# EAGLE board Shield (EAGLE 9.6.0)
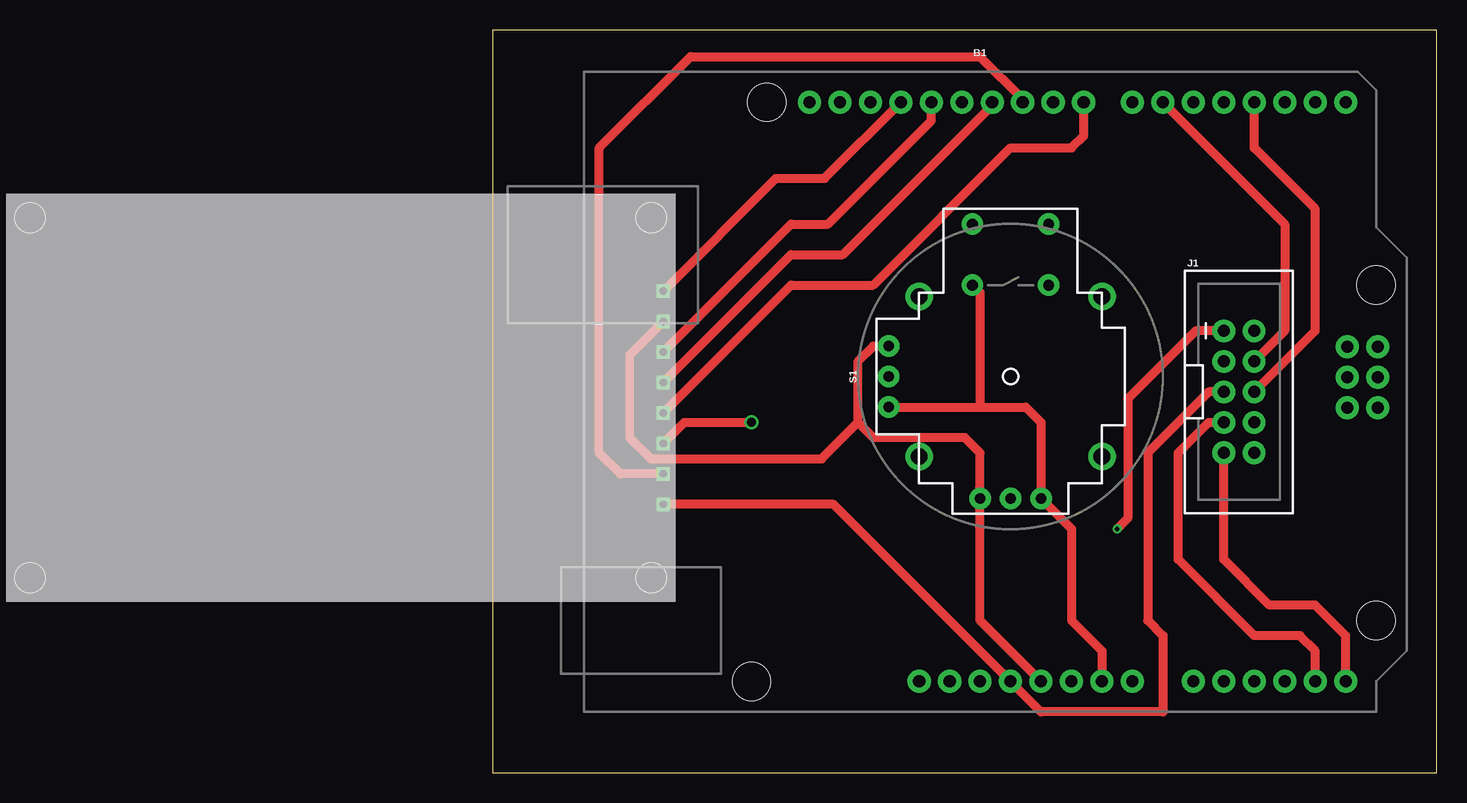
[diagram p0: board, top side]
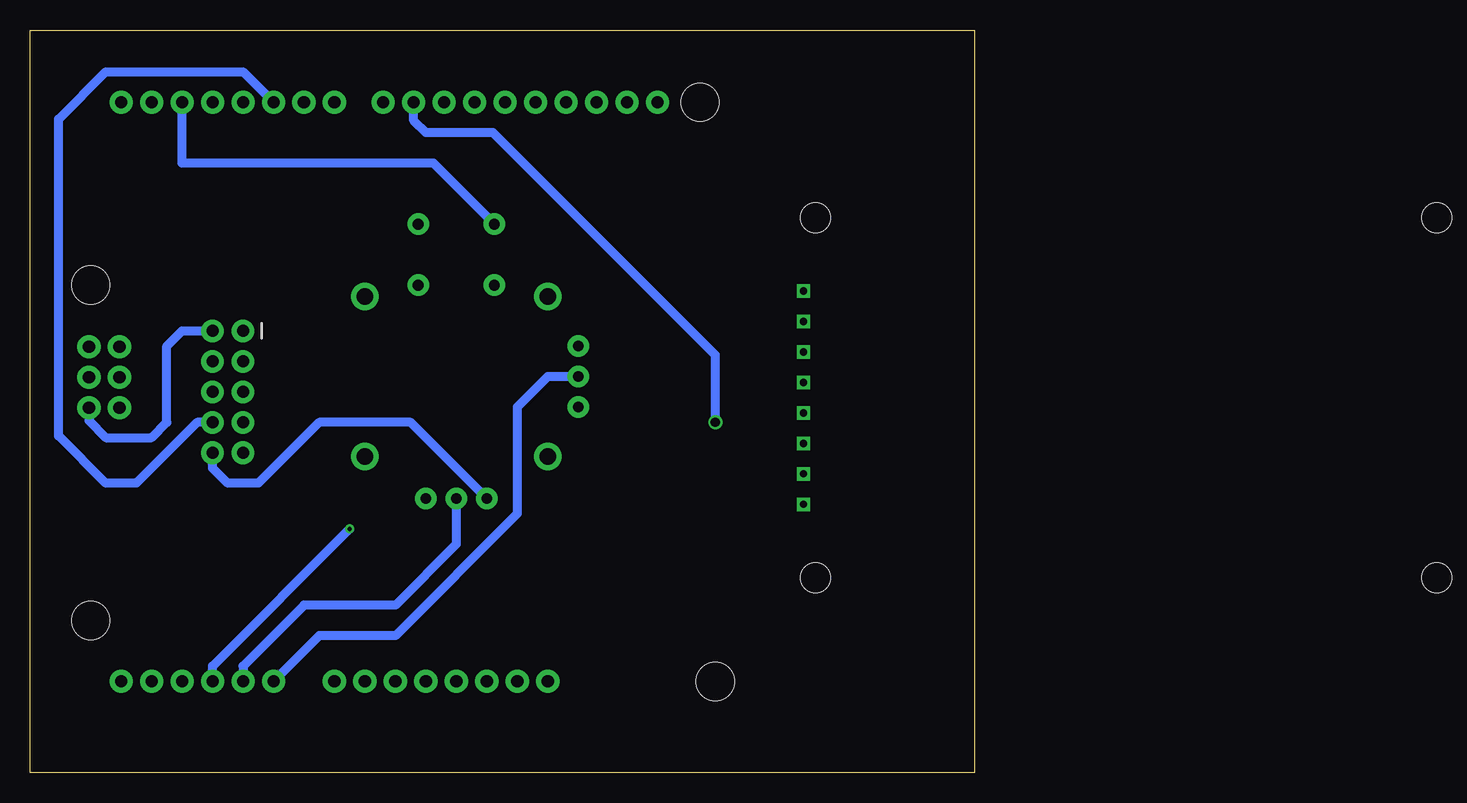
[diagram p1: board, bottom side, seen from below]

Size 78.72 x 61.9 mm. Coordinates in mm from the lower left corner, seen from the top.
Outline: 0,0 78.72,0 78.72,61.9 0,61.9 0,0
Copper layers (1*16): Top 0.035mm / dielectric 1.5mm / Bottom 0.035mm
Design rules "default": minimum track width 6mil, minimum drill 0.35mm, track to track 6mil, track to pad 6mil, pad to pad 6mil, via to via 6mil, smd to smd 6mil, copper to edge 40mil, drill to drill 6mil, minimum pad ring 10mil, minimum via ring 8mil, stop-mask expansion 4mil, vias tented up to drill 0mil, thermal gap 10mil

## Footprints (pad centres in the part's own frame; a part is rotated, then mirrored left to right if it is on the bottom)
TFT_DISP = drill 0.6 square: 1 8.11,-1; 2 10.65,-1; 3 13.19,-1; 4 15.73,-1; 5 18.27,-1; 6 20.81,-1; 7 23.35,-1; 8 25.89,-1 | hole 2.5: 2,-2; 32,-2; 2,-53.8; 32,-53.8
ARDUINO_R3 = drill 1.016 pad 1.93: 3.3V 2.54,-24.13; 5V 5.08,-24.13; A0 17.78,-24.13; A1 20.32,-24.13; A2 22.86,-24.13; A3 25.4,-24.13; A4 27.94,-24.13; A5 30.48,-24.13; AREF -9.144,24.13; D0 30.48,24.13; D1 27.94,24.13; D2 25.4,24.13; D3 22.86,24.13; D4 20.32,24.13; D5 17.78,24.13; D6 15.24,24.13; D7 12.7,24.13; D8 8.636,24.13; D9 6.096,24.13; D10 3.556,24.13; D11 1.016,24.13; D12 -1.524,24.13; D13 -4.064,24.13; GND@1 7.62,-24.13; GND@2 10.16,-24.13; GND@3 -6.604,24.13; GND@4 33.16,-1.32; IOREF -2.54,-24.13; MISO 30.62,3.76; MOSI 33.16,1.22; NC -5.08,-24.13; RESET@1 0,-24.13; RESET@2 30.62,-1.32; SCK 30.62,1.22; SCL -14.224,24.13; SDA -11.684,24.13; VCC 33.16,3.76; VIN 12.7,-24.13 | hole 3.175: -17.78,24.13; 33.02,8.89; 33.02,-19.05; -19.05,-24.13
2X5-SHROUDED = drill 1.016 pad 1.88: 1 -1.27,5.08; 2 1.27,5.08; 3 -1.27,2.54; 4 1.27,2.54; 5 -1.27,0; 6 1.27,0; 7 -1.27,-2.54; 8 1.27,-2.54; 9 -1.27,-5.08; 10 1.27,-5.08
JOYSTICK = drill 0.9 pad 1.778: B1A -3.175,12.7; B1B 3.175,12.7; B2A -3.175,7.62; B2B 3.175,7.62 | drill 0.889 pad 1.778: H1 -2.54,-10.16; H2 0,-10.16; H3 2.54,-10.16; V1 -10.16,2.54; V2 -10.16,0; V3 -10.16,-2.54 | drill 1.397 pad 2.286: MOUNT1 -7.62,6.668; MOUNT2 -7.62,-6.668; MOUNT3 7.62,-6.668; MOUNT4 7.62,6.668

## Placement (x,y rotation side)
1.77_TFT  TFT_DISPL_1.77"  [TFT_DISP]  15.24,48.26 270 top
B1  ARDUINO_UNO_R3  [ARDUINO_R3]  40.64,31.75 0 top
J1  [2X5-SHROUDED]  62.23,31.75 0 top
S1  JOYSTICK_THUMB  [JOYSTICK]  43.18,33.02 0 top

## Library data of the parts
1.77_TFT = ChopstixComponents
B1 = SparkFun-Boards
J1 = SparkFun-Connectors; PROD_ID: CONN-08671; SF_ID: PRT-08506
S1 = SparkFun-Switches; PROD_ID: COMP-09744; SF_SKU: COM-09032

## Nets
2: B1.D2 S1.B1A
3.3V: 1.77_TFT.8 B1.3.3V J1.5
5V: 1.77_TFT.2 B1.5V J1.10 S1.H1 S1.V1
8: 1.77_TFT.5 B1.D8
9: 1.77_TFT.6 B1.D9
10: 1.77_TFT.7 B1.D10
11: 1.77_TFT.4 B1.D11
13: 1.77_TFT.3 B1.D13
A0: B1.A0 S1.V2
A1: B1.A1 S1.H2
A2: B1.A2 J1.1
A4: B1.A4 J1.7
A5: B1.A5 J1.9
D3: B1.D3 J1.6
D5: B1.D5 J1.8
D6: B1.D6 J1.4
GND0: B1.GND@4 J1.2
GND1: 1.77_TFT.1 B1.GND@3
GND2: B1.GND@2 S1.B2A S1.H3 S1.V3

## Tracks (layer width: path | path; a pad name or v marks a point on that pad's centre or on a via)
2
  Bottom 0.762: S1.B1A 45.08,50.8 66.04,50.8 B1.D2
3.3V
  Top 0.762: 1.77_TFT.8 28.43,22.37 B1.3.3V 45.72,5.08 55.88,5.08 55.88,11.43 54.61,12.7 54.61,26.67 59.69,31.75 J1.5
5V
  Top 0.762: 30.48,29.21 31.75,27.94 39.37,27.94 40.64,26.67 S1.H1 40.64,12.7 B1.5V | 30.48,29.21 30.48,34.29 31.75,35.56 S1.V1 | 1.77_TFT.2 11.43,34.8 11.43,27.94 13.21,26.16 27.43,26.16 30.48,29.21
  Bottom 0.762: S1.H1 46.99,29.21 54.61,29.21 59.69,24.13 62.23,24.13 63.5,25.4 J1.10
8
  Top 0.762: 1.77_TFT.5 24.89,40.64 31.75,40.64 43.18,52.07 48.26,52.07 49.28,53.09 B1.D8
9  (via drill 0.76)
  Top 0.762: 1.77_TFT.6 16,29.21 v21.59,29.21
  Bottom 0.762: B1.D9 46.74,54.36 45.72,53.34 40.13,53.34 21.59,34.8 v21.59,29.21
10
  Top 0.762: 1.77_TFT.7 10.65,24.91 8.89,26.67 8.89,52.07 16.51,59.69 40.64,59.69 44.2,56.13 B1.D10
11
  Top 0.762: 1.77_TFT.4 24.89,43.18 29.21,43.18 41.66,55.63 B1.D11
13
  Top 0.762: 1.77_TFT.3 24.89,45.72 27.94,45.72 36.58,54.36 B1.D13
A0
  Bottom 0.762: S1.V2 35.56,33.02 38.1,30.48 38.1,21.59 48.26,11.43 54.61,11.43 B1.A0
A1
  Bottom 0.762: S1.H2 43.18,19.05 48.26,13.97 55.88,13.97 60.96,8.89 B1.A1
A2  (via drill 0.35)
  Top 0.762: v52.07,20.32 52.96,21.21 52.96,31.17 58.62,36.83 J1.1
  Bottom 0.762: B1.A2 63.5,8.89 v52.07,20.32
A4
  Top 0.762: B1.A4 68.58,10.16 67.31,11.43 63.5,11.43 57.15,17.78 57.15,26.67 59.69,29.21 J1.7
A5
  Top 0.762: B1.A5 71.12,11.43 68.58,13.97 64.77,13.97 60.96,17.78 J1.9
D3
  Top 0.762: J1.6 68.58,36.83 68.58,46.99 63.5,52.07 B1.D3
D5
  Bottom 0.762: J1.8 64.77,29.21 69.85,24.13 72.39,24.13 76.34,28.08 76.34,54.47 72.39,58.42 60.96,58.42 B1.D5
D6
  Top 0.762: B1.D6 66.04,45.72 66.04,36.83 J1.4
GND0
  Bottom 0.762: B1.GND@4 73.8,29.35 72.39,27.94 68.58,27.94 67.31,29.21 67.31,35.56 66.04,36.83 J1.2
GND1
  Top 0.762: 1.77_TFT.1 23.62,49.53 27.69,49.53 B1.GND@3
GND2
  Top 0.762: S1.V3 40.64,30.48 | 40.64,30.48 44.45,30.48 45.72,29.21 S1.H3 48.26,20.32 48.26,12.7 50.8,10.16 B1.GND@2 | S1.B2A 40.64,40.01 40.64,30.48